# EAGLE board GlucometerV2 (EAGLE 7.2.0)
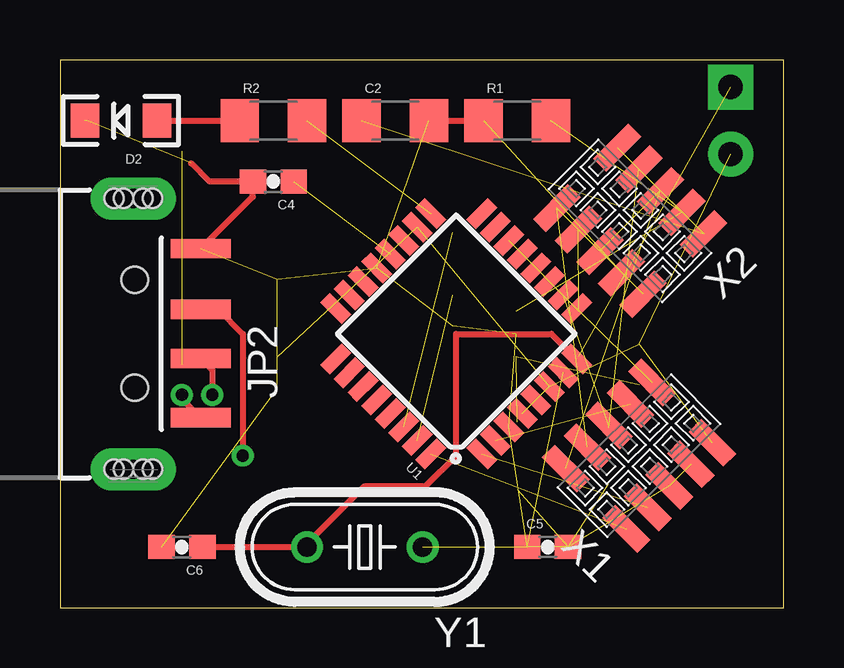
[diagram p0: board, top side]
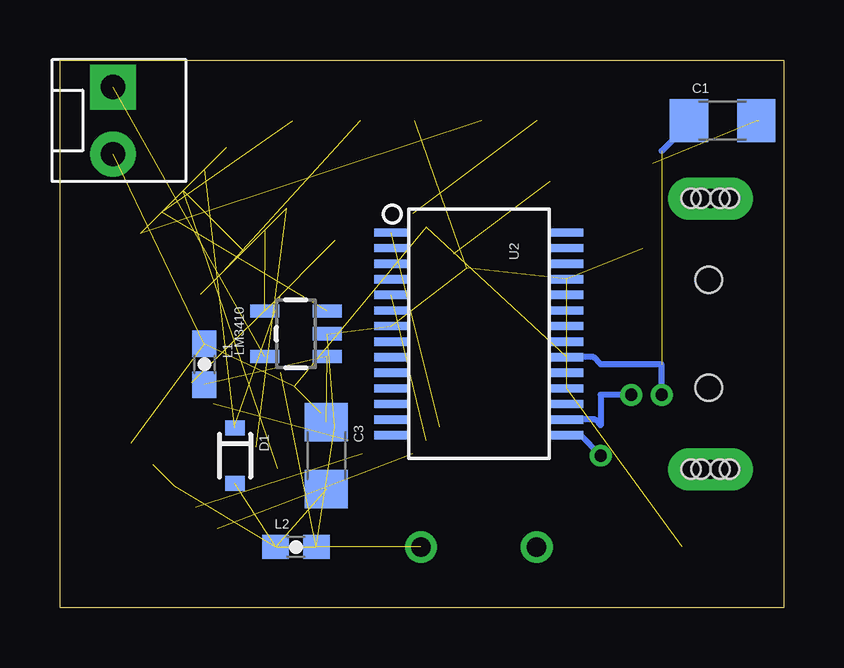
[diagram p1: board, bottom side, seen from below]

Size 30.15 x 22.85 mm. Coordinates in mm from the lower left corner, seen from the top.
Outline: 0,0 30.15,0 30.15,22.85 0,22.85 0,0
Copper layers (1*16): Top 0.035mm / dielectric 1.5mm / Bottom 0.035mm
Design rules "default": minimum track width 10mil, minimum drill 24mil, track to track 8mil, track to pad 8mil, pad to pad 8mil, via to via 8mil, smd to smd 8mil, copper to edge 40mil, drill to drill 8mil, minimum pad ring 10mil, minimum via ring 8mil, stop-mask expansion 4mil, vias tented up to drill 0mil, thermal gap 10mil

## Footprints (pad centres in the part's own frame; a part is rotated, then mirrored left to right if it is on the bottom)
1206 = smd 1.6 x 1.8: 1 -1.4,0; 2 1.4,0
0603-CAP = smd 1.1 x 1: 1 -0.85,0; 2 0.85,0
SOD-323 = smd 0.63 x 0.83: A 1.15,0; C -1.15,0
LED-1206 = smd 1.2 x 1.4: A -1.5,0; C 1.5,0
USB-A-SMT-MALE-LOCKING = smd 0.8 x 2.5: D+1 1.027,-5.87; D-1 -1.027,-5.87; GND1 3.551,-5.87; VBUS1 -3.5,-5.87 | drill 0.8 pad 1.778 long: P$1 5.647,-3.05; P$3 -5.647,-3.05 | hole 1.1: 2.25,-3.12; -2.25,-3.12 | hole 0.8: -5.647,-3.45; -5.647,-3.85; -5.647,-2.65; -5.647,-2.25; 5.647,-3.45; 5.647,-3.85; 5.647,-2.65; 5.647,-2.25
MOLEX-1X2_LOCK = drill 1.016 pad 1.88 square: 1 -0.127,0 | drill 1.016 pad 1.88: 2 2.667,0
0603 = smd 1.1 x 1: 1 -0.85,0; 2 0.85,0
SOT23-5 = smd 0.55 x 1.2: 1 -0.95,-1.3; 2 0,-1.3; 3 0.95,-1.3; 4 0.95,1.3; 5 -0.95,1.3
TQFP32-08 = smd 1.27 x 0.559: 1 -4.293,2.8; 2 -4.293,2; 3 -4.293,1.2; 4 -4.293,0.4; 5 -4.293,-0.4; 6 -4.293,-1.2; 7 -4.293,-2; 8 -4.293,-2.8; 17 4.293,-2.8; 18 4.293,-2; 19 4.293,-1.2; 20 4.293,-0.4; 21 4.293,0.4; 22 4.293,1.2; 23 4.293,2; 24 4.293,2.8 | smd 0.559 x 1.27: 9 -2.8,-4.293; 10 -2,-4.293; 11 -1.2,-4.293; 12 -0.4,-4.293; 13 0.4,-4.293; 14 1.2,-4.293; 15 2,-4.293; 16 2.8,-4.293; 25 2.8,4.293; 26 2,4.293; 27 1.2,4.293; 28 0.4,4.293; 29 -0.4,4.293; 30 -1.2,4.293; 31 -2,4.293; 32 -2.8,4.293
SSOP28DB = smd 0.348 x 1.397: 1 -4.225,-3.656; 2 -3.575,-3.656; 3 -2.925,-3.656; 4 -2.275,-3.656; 5 -1.625,-3.656; 6 -0.975,-3.656; 7 -0.325,-3.656; 8 0.325,-3.656; 9 0.975,-3.656; 10 1.625,-3.656; 11 2.275,-3.656; 12 2.925,-3.656; 13 3.575,-3.656; 14 4.225,-3.656; 15 4.225,3.656; 16 3.575,3.656; 17 2.925,3.656; 18 2.275,3.656; 19 1.625,3.656; 20 0.975,3.656; 21 0.325,3.656; 22 -0.325,3.656; 23 -0.975,3.656; 24 -1.625,3.656; 25 -2.275,3.656; 26 -2.925,3.656; 27 -3.575,3.656; 28 -4.225,3.656
1296-10 = smd 0.76 x 2.05: 1 -2.54,-1.78; 2 -2.54,1.78; 3 -1.27,-1.78; 4 -1.27,1.78; 5 0,-1.78; 6 0,1.78; 7 1.27,-1.78; 8 1.27,1.78; 9 2.54,-1.78; 10 2.54,1.78
HC49U-V = drill 0.813: 1 -2.413,0; 2 2.413,0

## Placement (x,y rotation side)
C1  10uF  [1206]  2.54,20.32 0 bottom
C2  10uF  [1206]  13.97,20.32 0 top
C3  2.2uF  [1206]  19.05,6.35 270 bottom
C4  0.1uF  [0603-CAP]  8.89,17.78 180 top
C5  0.1uF  [0603-CAP]  20.32,2.54 0 top
C6  0.1uF  [0603-CAP]  5.08,2.54 180 top
D1  5.6V  [SOD-323]  22.86,6.35 270 bottom
D2  RED  [LED-1206]  2.54,20.32 180 top
JP2  USBA-SMD-MALE-LOCKING  [USB-A-SMT-MALE-LOCKING]  0,11.43 90 top
JP7  [MOLEX-1X2_LOCK]  27.94,21.59 270 bottom
L1  4.7uH  [0603]  24.13,10.16 270 bottom
L2  4.7uH  [0603]  20.32,2.54 0 bottom
LM3410  TC7SU04F  [SOT23-5]  20.32,11.43 90 bottom
R1  [1206]  19.05,20.32 0 top
R2  [1206]  8.89,20.32 0 top
U1  ATMEGA328P_TQFP  [TQFP32-08]  16.51,11.43 135 top
U2  FT232RLSSOP  [SSOP28DB]  12.7,11.43 270 bottom
X1  1296-T10  [1296-10]  24.13,6.35 45 top
X2  1296-T10  [1296-10]  23.76,16.14 135 top
Y1  [HC49U-V]  12.7,2.54 180 top

## Library data of the parts
C1-C3 = SparkFun-Passives
C4-C6 = SparkFun-Capacitors; PROD_ID: CAP-00810
D1 = SparkFun-DiscreteSemi; PROD_ID: DIO-12442
D2 = SparkFun-LED; PROD_ID: DIO-00809
JP2 JP7 = SparkFun-Connectors
L1 L2 = SparkFun-Passives; PROD_ID: RES-07859
LM3410 = SparkFun-DigitalIC; NOTE: RETIRED; PROD_ID: 8211
R1 R2 = SparkFun-Resistors
U1 = SparkFun-DigitalIC; PROD_ID: IC-09069
U2 = SparkFun-DigitalIC; PROD_ID: IC-00870
X1 X2 = con-leotronics; OC_FARNELL: unknown; OC_NEWARK: unknown
Y1 = SparkFun-FreqCtrl

## Nets
D+: JP2.D+1 U2.15
D-: JP2.D-1 U2.16
FB: LM3410.3 R1.2 X2.3 X2.9
GND: C1.2 C2.2 C4.2 C5.2 C6.2 D2.C JP2.GND1 L2.2 LM3410.2 R1.1 U1.3 U1.21 U2.7 U2.18 U2.21 U2.25 X1.5 X1.7 X2.4
IND: R2.2 U1.17
INPUTV: JP7.1 LM3410.5
LGND: X1.4 X2.2 X2.10
LOUT: X1.2 X2.5 X2.6
N$1: C4.1 U1.20
N$2: D2.A R2.1
N$3: C5.1 U1.7 Y1.1
N$5: C6.1 U1.8 Y1.2
PWM: LM3410.4 U1.14 X2.8
RX: U1.30 U2.1
S0: U1.32 X1.1
S1: U1.1 X1.3
S2: U1.2 X1.8
S3: U1.10 X1.6
SENSOROUT: U1.9 X1.10
SWITCH: C3.1 L1.2 LM3410.1
TMP0: C3.2 D1.A L2.1
TX: U1.31 U2.5
VCCIO: U2.4
VIN: C1.1 JP2.VBUS1 JP7.2 L1.1 U1.4 U1.6 U1.18 U2.20 X1.9
VOUT: C2.1 D1.C X2.1 X2.7

## Tracks (layer width: path | path; a pad name or v marks a point on that pad's centre or on a via)
D+  (via drill 0.51)
  Top 0.254: JP2.D+1 6.59,12.46 7.62,11.43 v7.62,6.35
  Bottom 0.254: v7.62,6.35 8.47,7.21 U2.15
D-  (via drill 0.51)
  Top 0.254: JP2.D-1 6.35,9.92 v6.35,8.89
  Bottom 0.254: v6.35,8.89 7.62,8.89 7.62,7.62 7.86,7.86 U2.16
FB  (3 unrouted)
GND  (16 unrouted)
  Top 0.254: JP2.GND1 8.04,17.15 C4.2 6.22,17.78 5.46,18.54 | C2.2 R1.1
IND  (1 unrouted)
INPUTV  (1 unrouted)
LGND  (2 unrouted)
LOUT  (2 unrouted)
N$1  (1 unrouted)
N$2
  Top 0.254: D2.A R2.1
N$3  (2 unrouted)
N$5
  Top 0.254: C6.1 Y1.2 10.29,2.67 12.7,5.08 15.24,5.08 16.51,6.35 16.51,11.43 20.47,11.43 U1.8
PWM  (2 unrouted)
RX  (1 unrouted)
S0  (1 unrouted)
S1  (1 unrouted)
S2  (1 unrouted)
S3  (1 unrouted)
SENSOROUT  (1 unrouted)
SWITCH  (2 unrouted)
TMP0  (2 unrouted)
TX  (1 unrouted)
VIN  (via drill 0.51)  (7 unrouted)
  Top 0.254: JP2.VBUS1 5.08,8.72 v5.08,8.89
  Bottom 0.254: v5.08,8.89 5.08,10.16 7.62,10.16 7.92,10.46 U2.20 | C1.1 3.94,20.19 5.08,19.05
VOUT  (3 unrouted)